# Altium PCB HnWrist_ExtendBoard.PcbDoc
Units mil, origin at the board's own origin, x right, y up, seen from the top; angles counter-clockwise.
Board outline 1130 x 1625 mil, 2 copper layers (Top Layer, Bottom Layer); 10 components, 6 nets, 41 pads, 29 vias.
Unrouted connection lines stored in the file: 23.
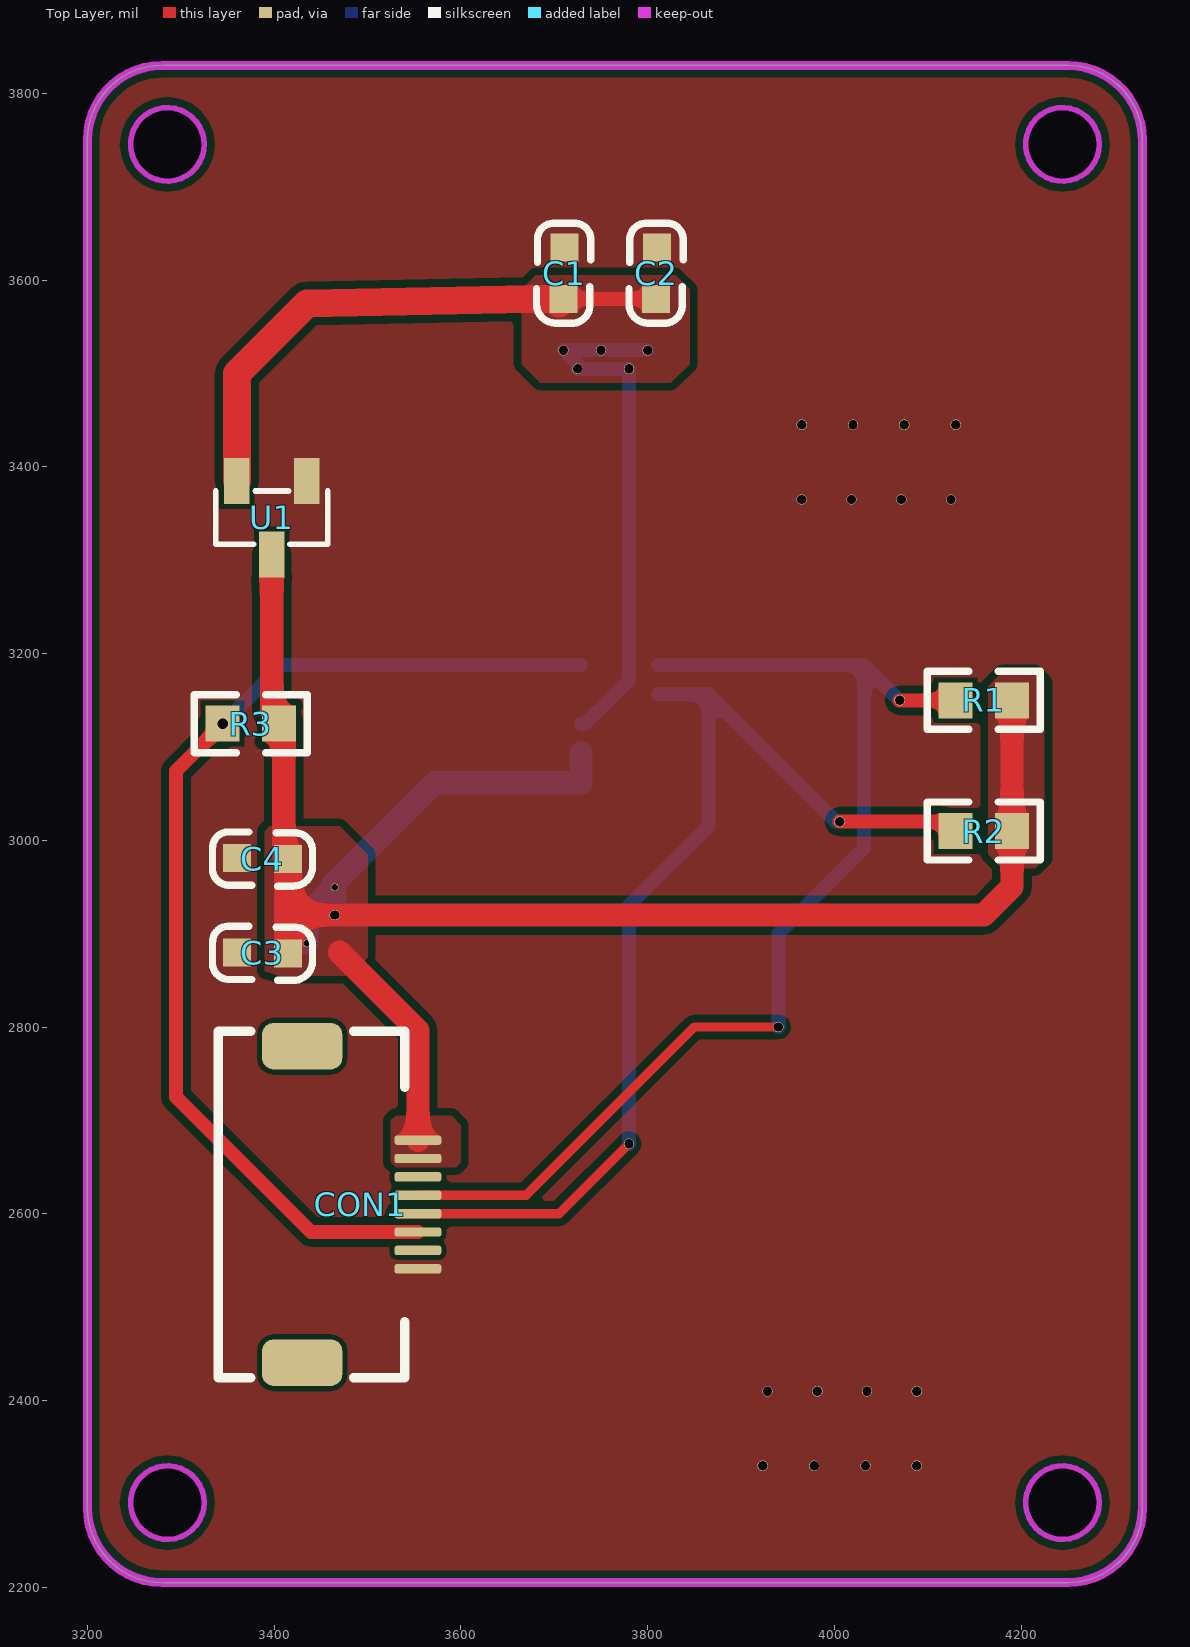
[diagram p0: Top Layer view]
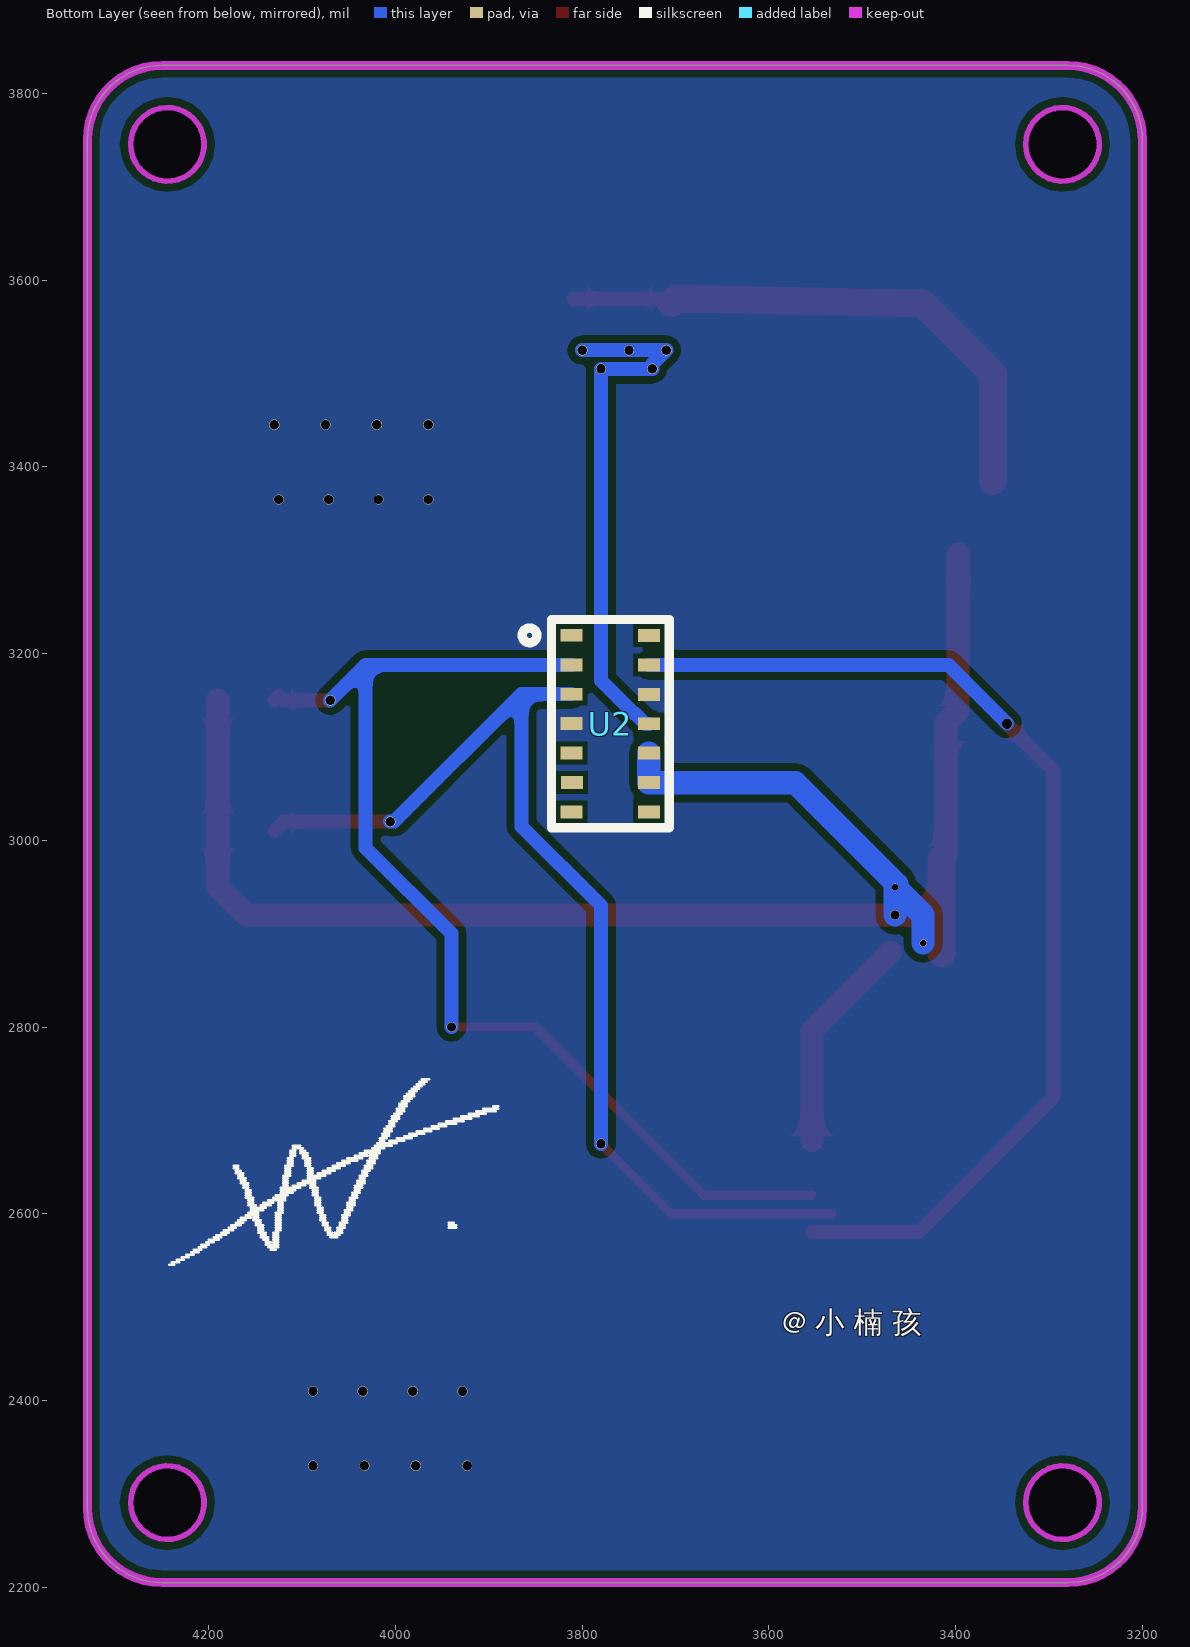
[diagram p1: Bottom Layer view, seen from below]
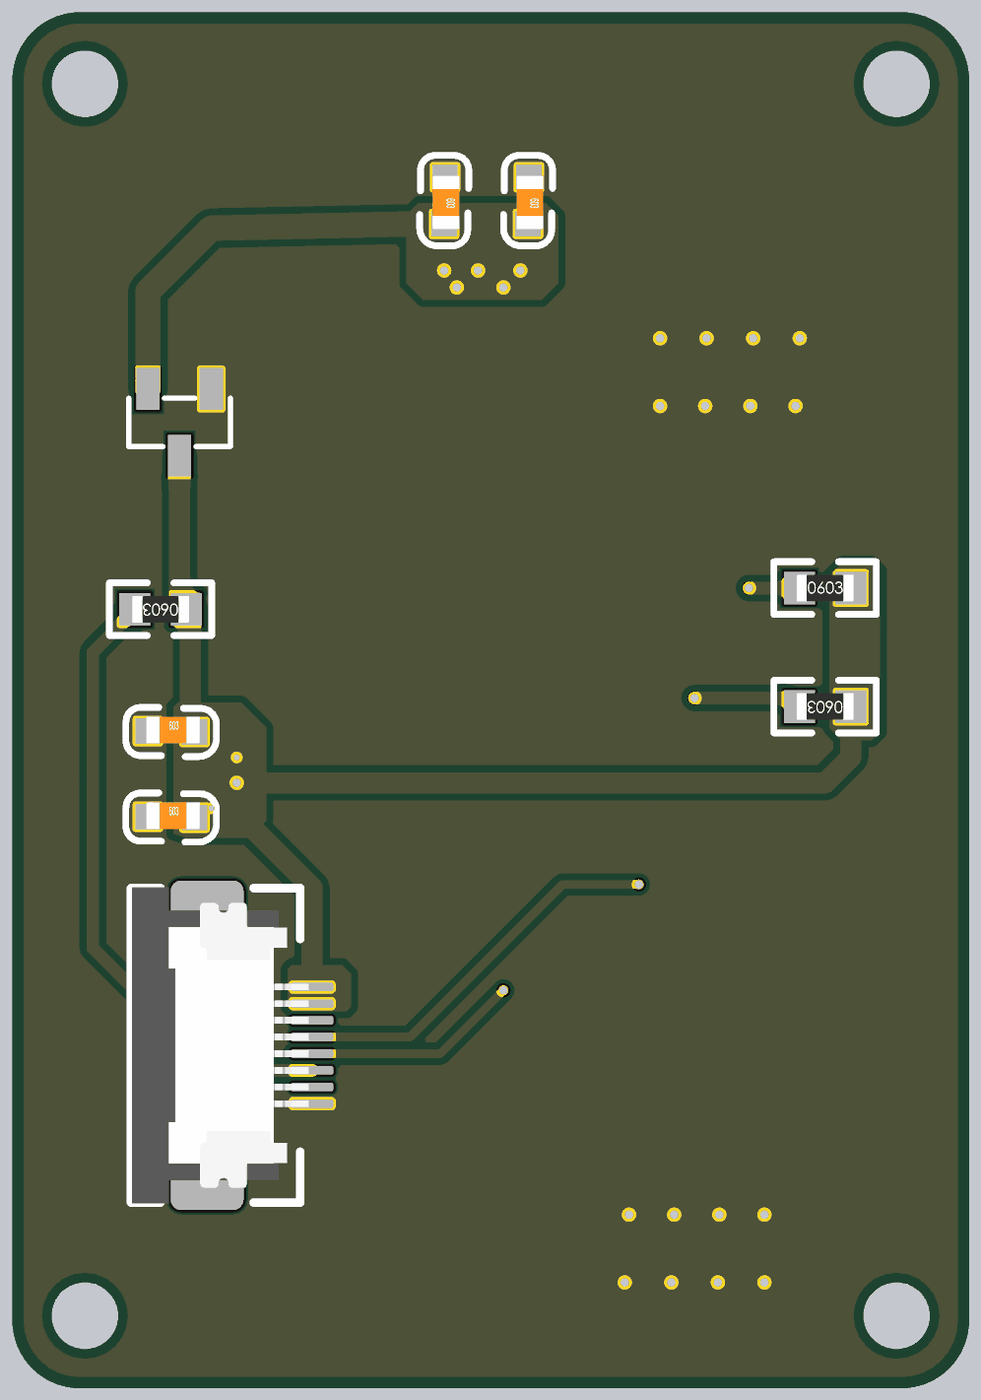
[diagram p2: 3D render of the assembled board from above, using the file's embedded part models]

## Layer stack, top to bottom
Top Solder: solder mask 0.4, Solder Resist, Dk 3.5
Top Layer: signal copper 1.4
Dielectric 1: dielectric 12.6, FR-4, Dk 4.8
Bottom Layer: signal copper 1.4
Bottom Solder: solder mask 0.4, Solder Resist, Dk 3.5

## Board outline
3200,2285 ccw(c3280,2285) 3280,2205 4250,2205 ccw(c4250,2285) 4330,2285 4330,3750 ccw(c4250,3750) 4250,3830 3280,3830 ccw(c3280,3750) 3200,3750
cut-out: 4205,2290.63 ccw(c4244.37,2290.63) 4244.37,2251.26 ccw(c4244.37,2290.63) 4283.74,2290.63 ccw(c4244.37,2290.63) 4244.37,2330 ccw(c4244.37,2290.63)
cut-out: 3246.26,2290.63 ccw(c3285.63,2290.63) 3285.63,2251.26 ccw(c3285.63,2290.63) 3325,2290.63 ccw(c3285.63,2290.63) 3285.63,2330 ccw(c3285.63,2290.63)
cut-out: 4205,3745.43 ccw(c4244.37,3745.43) 4244.37,3706.06 ccw(c4244.37,3745.43) 4283.74,3745.43 ccw(c4244.37,3745.43) 4244.37,3784.8 ccw(c4244.37,3745.43)
cut-out: 3285.63,3706.06 cw(c3285.63,3745.43) 3246.26,3745.43 cw(c3285.63,3745.43) 3285.63,3784.8 cw(c3285.63,3745.43) 3325,3745.43 cw(c3285.63,3745.43)

## Design rules (kind name [scope] priority, off if disabled: settings)
Clearance [All] p1: gap=5 ignorepadtopadclearanceinfootprint=FALSE except(8: Arc-Fill Arc-Poly Arc-Region Track-Fill Track-Poly Track-Region Fill-Fill Fill-Poly Fill-Region Poly-Poly Poly-Region Region-Region)
ComponentClearance [All] p1: gap=0 collisioncheckmode=3 verticalgap=0 showdistances=FALSE
DiffPairsRouting [All] p1: maxlimit=9 minlimit=9 mostfreqgap=9 toplayer_minwidth=4 toplayer_maxwidth=4 toplayer_prefwidth=4 bottomlayer_minwidth=4 bottomlayer_maxwidth=4 bottomlayer_prefwidth=4 maxuncoupledlength=500
FanoutControl Fanout_BGA [All] p1: bgadir=Out bgaviamode=Centered fanoutstyle=Auto fanoutdirection=Alternating viagrid=1 // Fanout_BGA (Default Rule)
HoleSize [All] p1: absolutevalues=TRUE maxlimit=10000 minlimit=8 maxpercent=80.000 minpercent=20.000
MinimumSolderMaskSliver [All] p1 off: minsoldermaskwidth=2
PlaneClearance [All] p1: clearance=8
PlaneConnect [All] p1: planeconnectstyle=Direct reliefexpansion=20 reliefentries=4 reliefconductorwidth=10 reliefairgap=10
PolygonConnect [All] p1: connectstyle=Direct reliefconductorwidth=10 reliefentries=4 polygonreliefangle="90 Angle" airgapwidth=10
RoutingVias [All] p1: holewidth=8 width=16 viastyle="Through Hole" minholewidth=6 minwidth=12 maxholewidth=28 maxwidth=50
SilkToSilkClearance [All] p1: silktosilkclearance=0
SilkToSolderMaskClearance [IsPad] p1: minsilkscreentomaskgap=0 clearancetoexposedcopper=TRUE
SolderMaskExpansion [All] p1: expansion=3 istentingtop=FALSE
Width [All] p1: maxlimit=10000 minlimit=4 preferedwidth=4
21 further rules are at their usual default settings.

## Classes and differential pairs
net class GND: GND
net class PWR: 1V8 3V3

## Components (designator, comment, footprint, x,y, rotation, side; value= is the part's Value field where it differs from the comment)
C1 "106" 0603C 3711.35,3635.21 r270 top
C2 "104" 0603C 3810.35,3635.21 r270 top
C3 "106" 0603C 3359.79,2880.35 r0 top
C4 "104" 0603C 3359.79,2981.35 r0 top
CON1 "FFC_0.5_8" FFC_0.5_8 3465,2610 r90 top
R1 "470Ω" LC-0603_R 4160,3150 r0 top
R2 "470Ω" LC-0603_R 4160,3010 r180 top
R3 "470Ω" LC-0603_R 3375,3125 r180 top
U1 "65K5." SOT-23-3_L2.9-W1.3-P1.90-LS2.4-BR 3397.47,3345.63 r90 top
U2 "MAX30102" SENSOR-SMD_MAX30102 3770,3125 r270 bottom

## Footprints (in the part's own frame and the unit in brackets; to place one, negate y for a bottom-side part, rotate by r counter-clockwise, add the part's x,y. Pads: shape width x height; smd on the part's side, far side on the other; paste and mask are expansions set on the pad)
0603C [mil]
  rect 30x30 smd: 1(0.21,-0.35) 2(55.21,-1.35)
  silkscreen extent -26,-30 81,28, body extent -1,-15 62,17, height 12
FFC_0.5_8 [mil]
  rrect50% 50x86 smd: 0(-169.5,35) 0(169.5,35)
  rrect50% 10x50 smd: 1(-68.9,-89) 2(-49.21,-89) 3(-29.53,-89) 4(-9.84,-89) 5(9.84,-89) 6(29.53,-89) 7(49.21,-89) 8(68.9,-89)
  silkscreen extent -186,-75 186,125, body extent -187,-87 187,124, height 82
LC-0603_R [mm]
  rect 0.93x0.98 smd: 1(-0.77,0) 2(0.77,0)
  silkscreen extent -1.53,-0.79 1.54,0.79, body extent -0.85,-0.4 0.85,0.4, height 0.56
SENSOR-SMD_MAX30102 [mm] "血氧心率芯片"
  rect 0.35x0.6 smd: 1(-2.404,-1.052) 2(-1.6,-1.049) 3(-0.8,-1.049) 4(0,-1.05) 5(0.8,-1.049) 6(1.602,-1.046) 7(2.4,-1.049) 8(2.404,1.052) 9(1.604,1.052) 10(0.804,1.051) 11(0.004,1.052) 12(-0.797,1.051) 13(-1.597,1.051) 14(-2.397,1.051)
  silkscreen extent -2.83,-2.4 2.83,1.6
SOT-23-3_L2.9-W1.3-P1.90-LS2.4-BR [mm]
  rect 1.25x0.7 smd: 1(1,-0.95) 2(1,0.95) 3(-1,0)
  silkscreen extent -0.73,-1.53 0.73,1.53

## Part data
C1 C2 C3 C4: library part CAP, "无极性电容"
CON1: "FFC", System=Connector
R1 R2 R3: library part "0603 470Ω (4700) 1%", "贴片电阻", Package=0603, SuppliersPartNumber=C23179, ComponentLink1Description=供应商链接, ComponentLink1URL=http://www.szlcsc.com/product/details_23906.html, Supplier=LC
U1: BOM_JLCPCB Part Class="Extended Part", BOM_Manufacturer="Shenzhen Fuman Elec", BOM_Manufacturer Part=65K5., BOM_Supplier=LCSC, BOM_Supplier Part=C841299, Contributor=LCSC, spicePre=U, spiceSymbolName=65K5.
U2: "血氧心率芯片", BOM_JLCPCB Part Class="Extended Part", BOM_Manufacturer=MAXIM, BOM_Manufacturer Part=MAX30100EFD+, BOM_Supplier=LCSC, BOM_Supplier Part=C92512, spicePre=U, spiceSymbolName=MAX30100EFD+

## Via types
v1: diameter 11, hole 10, Top Layer to Bottom Layer, 26 vias
v2: diameter 8, hole 7, Top Layer to Bottom Layer, 2 vias
v3: diameter 11, hole 11, Top Layer to Bottom Layer, 1 vias

## Nets (pads, with @x,y where several pads share a name; then routed paths per layer and width w, separated by ;. In a path a pad name is that pad's centre, name@x,y a point inside that pad or via, vN(x,y) a via of type N, cw(c..) or ccw(c..) an arc to the next point about the centre after c; other vN are vias at no path point)
1V8: C1.2 C2.2 U1.2 U2.11 | length 1174.8
  Top Layer w15: C1.2@3705,3575 C1.2 C2.2
  Top Layer w30: U1.2 3360,3385.07 3360,3500 3435,3575 3675,3580 3700,3580 C1.2@3705,3575
  Bottom Layer w15: U2.11 3732.3,3124.84 3743.52,3136.06 3744.69,3136.06 3780,3171.36 v1(3780,3505) v1(3725,3505) 3725,3510 v1(3710,3525) v1(3750,3525) v1(3800,3525)
3V3: C3.2 C4.2 CON1.7 CON1.8 R1.2 R2.1 R3.1 U1.3 U2.9 U2.10 | length 2102.5
  Top Layer w25: U1.3 3397.47,3138.83 3410.31,3125.98 3410.31,2984.69 C4.2 ; 3415,2920 v1(3465,2920) 4160,2920 4190.31,2950.31 R2.1 R1.2 ; 3470,2880 3554,2796 CON1.8
  Top Layer w30: C3.2 3415,2920 C4.2
  Bottom Layer w25: v2(3435,2890) 3435,2920 v2(3465,2950) v1(3465,2920) ; v2@3463.09,2953.09 3571.84,3061.84 U2.9 U2.10@3728.61,3093.35
GND: C1.1 C2.1 C3.1 C4.1 CON1.1 U1.1 U2.4 U2.12
  other v1: 3923.33,2330 3978.33,2330 4033.33,2330 4088.33,2330 3928.33,2410 3981.67,2410 4035,2410 4088.33,2410 3965,3365 4018.33,3365 4071.67,3365 4125,3365 3965,3445 4020,3445 4075,3445 4130,3445
MAX30102_INT: CON1.3 R3.2 U2.13 | length 1149.1
  Top Layer w15: R3.2 3344.68,3124.02 3295,3074.33 3295,2725 3439.53,2580.47 CON1.3
  Bottom Layer w15: v3(3345,3125) 3407.86,3187.86 U2.13
MAX30102_SCL: CON1.5 R1.1 U2.2 | length 1225
  Top Layer w10: CON1.5 3669.84,2619.84 3850,2800 v1(3940,2800)
  Top Layer w15: v1(4070,3150) 4119.69,3150 4124.69,3155 R1.1
  Bottom Layer w15: U2.2 4032,3188 ; v1(3940,2800) 3940,2900 4032,2992 4032,3188 ; v1(4070,3150) 4032,3188
MAX30102_SDA: CON1.4 R2.2 U2.3 | length 1174.5
  Top Layer w10: CON1.4@3532.38,2600 3532.54,2600.16 CON1.4 3705.16,2600.16 v1(3780,2675)
  Top Layer w15: v1(4005.75,3020) 4119.68,3020 R2.2
  Bottom Layer w15: v1(3780,2675) 3780,2930 3865,3015 3865,3156.5 ; U2.3 3865,3156.5 ; v1(4005.75,3020) 4001.5,3020 3865,3156.5
pads on no net: CON1.0 CON1.2 CON1.6 U2.1 U2.5 U2.6 U2.7 U2.8 U2.14

## Polygon pours and split planes (outlines as drawn)
GND on Top Layer "GND_L01_P013" (solid, remove dead copper, pour order 13): 3020,3595 3040,3615 3040,3920 3175,4055 4335,4055 4520,3870 4520,2205 4330,2015 3215,2015 3030,2200
1V8 on Top Layer "1V8_L01_P005" (solid, pour order 5): 3665,3590 3680,3605 3830,3605 3845,3590 3845,3510 3825,3490 3685,3490 3665,3510
3V3 on Top Layer "3V3_L01_P001" (solid, pour order 1): 3530,2650 3525,2655 3525,2700 3530,2705 3590,2705 3600,2695 3600,2655 3595,2650
3V3 on Top Layer "3V3_L01_P000" (solid, pour order 0): 3405,2855 3390,2860 3390,2865 3390,3010 3395,3015 3470,3015 3500,2985 3500,2875 3480,2855
3V3 on Top Layer "3V3_L01_P003" (solid, pour order 3): 4180,3180 4165,3165 4165,2985 4180,2970 4215,2970 4225,2980 4225,3170 4215,3180
GND on Bottom Layer "GND_L02_P012" (solid, remove dead copper, pour order 12): 2980,3580 2985,3585 2985,3995 3120,4130 4360,4130 4570,3920 4570,2230 4310,1970 3130,1970 2970,2130

## Keep-outs
Keep-Out Layer:
  circle w6: c4244.37,2290.63 r39.37
  circle w6: c3285.63,3745.43 r39.37
  circle w6: c3285.63,2290.63 r39.37
  circle w6: c4244.37,3745.43 r39.37
  lines w10: 3200,2285 ccw(c3280,2285) 3280,2205 4250,2205 ccw(c4250,2285) 4330,2285 4330,3750 ccw(c4250,3750) 4250,3830 3280,3830 ccw(c3280,3750) 3200,3750 3200,2285

## Silkscreen, mask and mechanical layers (free items; w line width, h text height)
Bottom Overlay:
  drawing of 223 lines, arcs and shapes, not listed
  text "@ 小 楠 孩" at 3585,2465 h39.37